# EAGLE board DashDial (EAGLE 9.6.2)
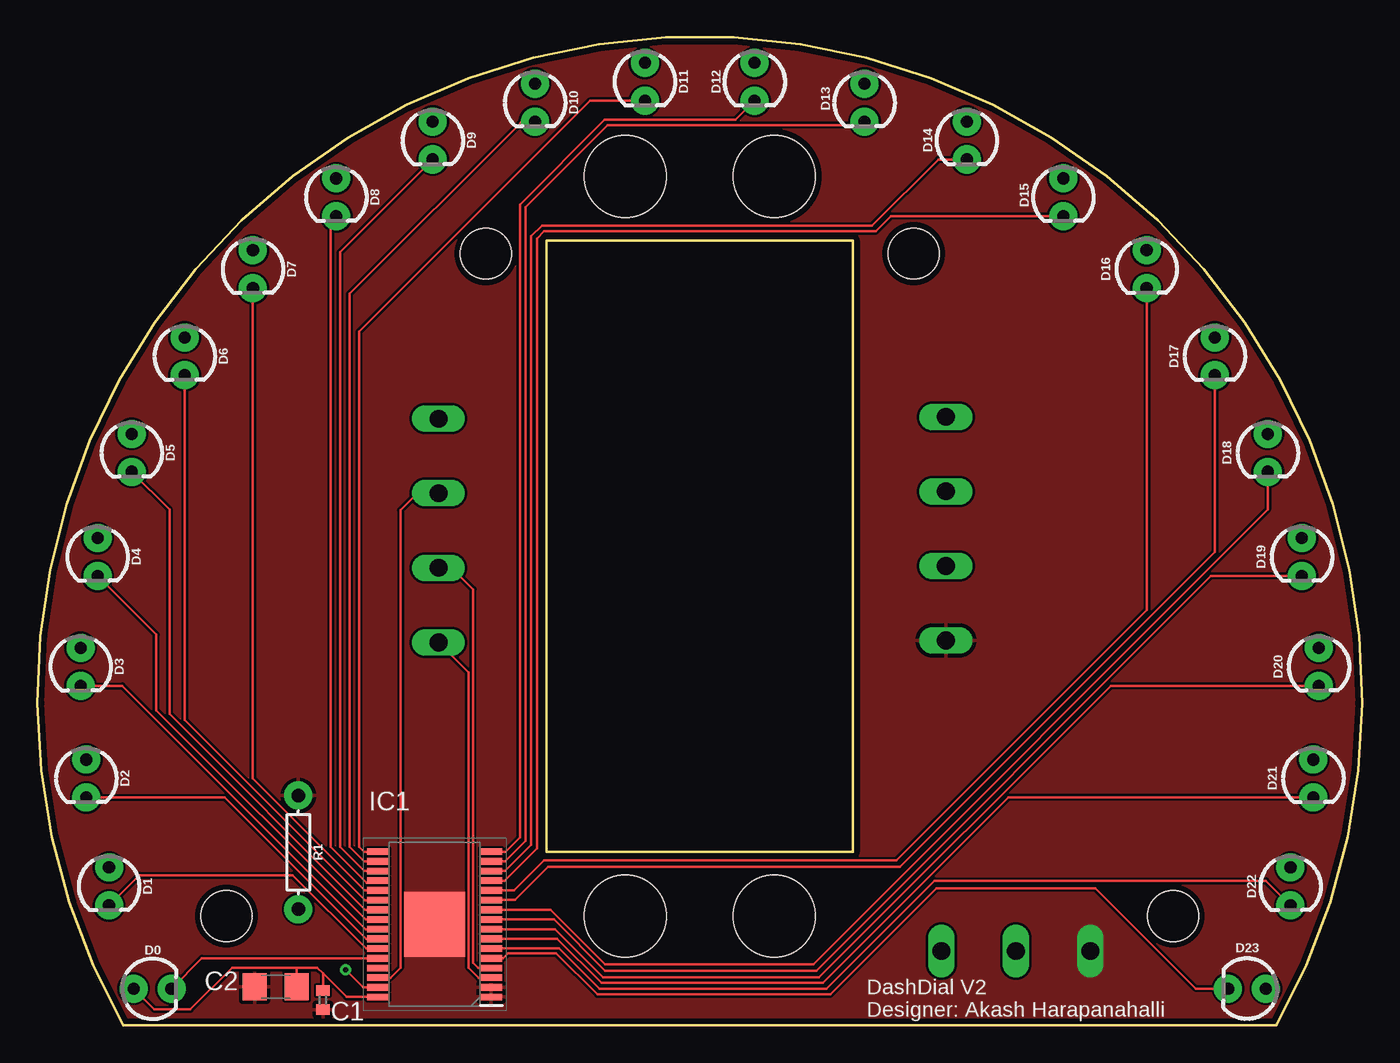
[diagram p0: board, top side]
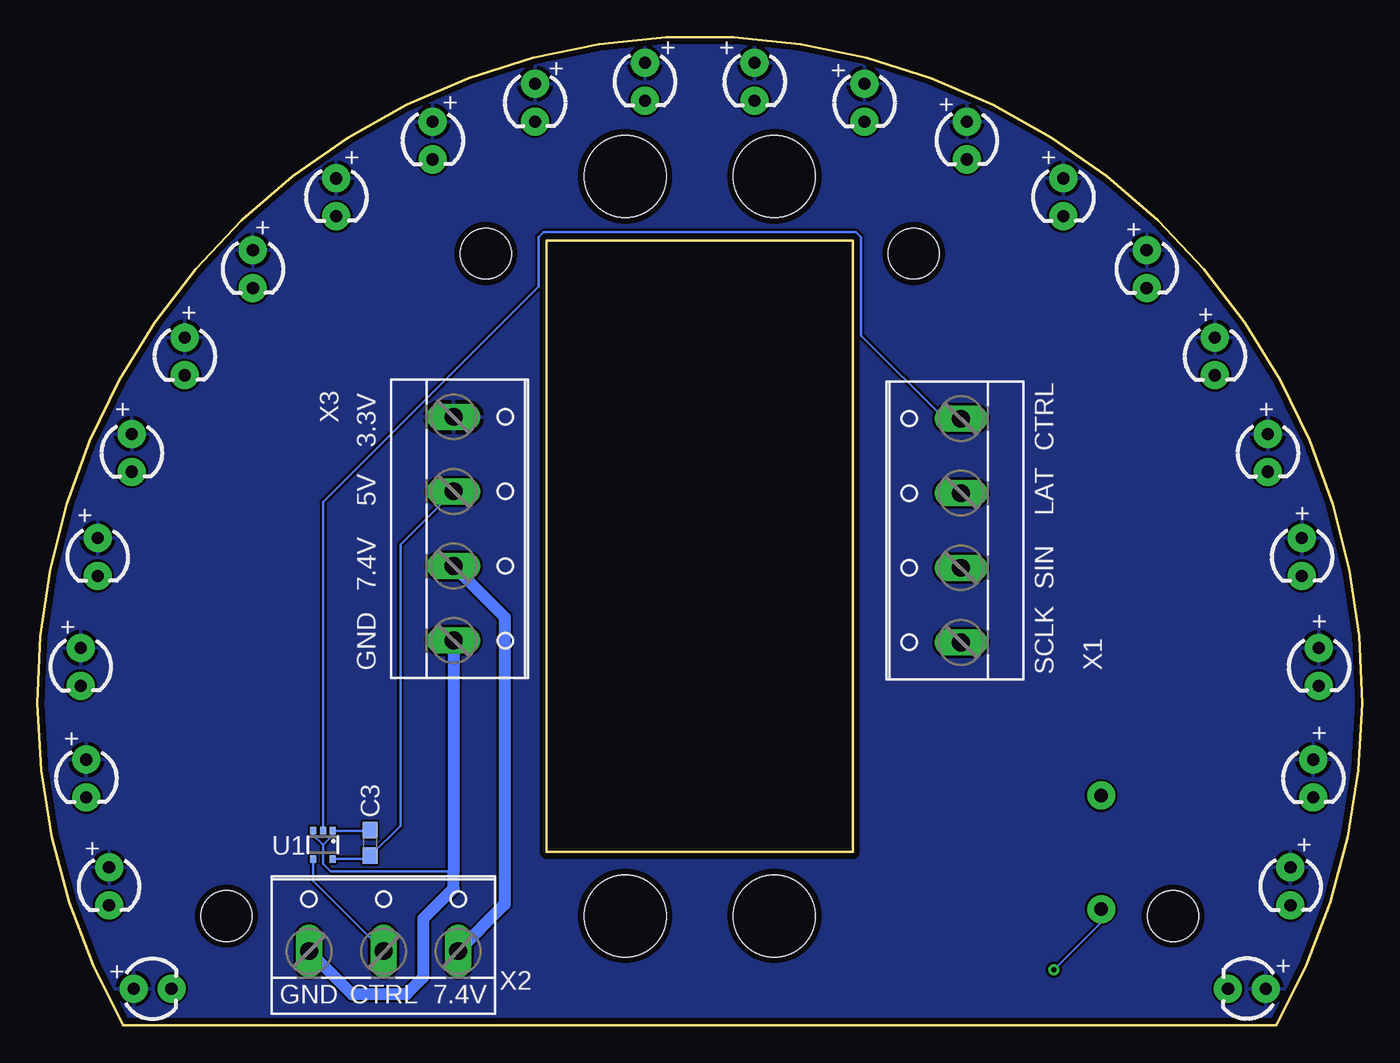
[diagram p1: board, bottom side, seen from below]

Size 88.87 x 66.28 mm. Coordinates in mm from the lower left corner, seen from the top.
Outline: 5.77,0 arc-239 83.09,0 5.77,0
Outline: 34.17,11.63 34.17,52.65 54.7,52.65 54.7,11.63 34.17,11.63
Copper layers (1*16): Top 0.035mm / dielectric 1.5mm / Bottom 0.035mm
Design rules "default *": minimum track width 6mil, minimum drill 0.35mm, track to track 6mil, track to pad 6mil, pad to pad 6mil, via to via 6mil, smd to smd 6mil, copper to edge 0.4mm, drill to drill 6mil, minimum pad ring 10mil, minimum via ring 8mil, stop-mask expansion 4mil, vias tented up to drill 0mil, thermal gap 10mil
Holes 5.51 mm at 39.43,56.95 49.44,56.95 39.43,7.34 49.44,7.34
Holes 3.4 mm at 12.68,7.34 30.08,51.77 58.78,51.77 76.18,7.34

## Footprints (pad centres in the part's own frame; a part is rotated, then mirrored left to right if it is on the bottom)
C0402 = smd 0.7 x 0.9: 1 -0.65,0; 2 0.65,0
C1206 = smd 1.6 x 1.8: 1 -1.4,0; 2 1.4,0
0603 = smd 1.1 x 1: 1 -0.85,0; 2 0.85,0
LED_3MM = drill 0.813 pad 1.88: A -1.27,0; K 1.27,0
SOP65P810X120-33N = smd 1.475 x 0.45: 1 -3.788,4.875; 2 -3.788,4.225; 3 -3.788,3.575; 4 -3.788,2.925; 5 -3.788,2.275; 6 -3.788,1.625; 7 -3.788,0.975; 8 -3.788,0.325; 9 -3.788,-0.325; 10 -3.788,-0.975; 11 -3.788,-1.625; 12 -3.788,-2.275; 13 -3.788,-2.925; 14 -3.788,-3.575; 15 -3.788,-4.225; 16 -3.788,-4.875; 17 3.788,-4.875; 18 3.788,-4.225; 19 3.788,-3.575; 20 3.788,-2.925; 21 3.788,-2.275; 22 3.788,-1.625; 23 3.788,-0.975; 24 3.788,-0.325; 25 3.788,0.325; 26 3.788,0.975; 27 3.788,1.625; 28 3.788,2.275; 29 3.788,2.925; 30 3.788,3.575; 31 3.788,4.225; 32 3.788,4.875 | smd 4.11 x 4.36: 33 0,0
AXIAL-0.3 = drill 0.9 pad 1.88: P$1 -3.81,0; P$2 3.81,0
SOT353 = smd 0.4 x 0.5: 1 -0.65,-0.95; 2 0,-0.95; 3 0.65,-0.95; 4 0.65,0.95; 5 -0.65,0.95
W237-4 = drill 1.194 long: 1 -7.5,-1.27; 2 -2.5,-1.27; 3 2.5,-1.27; 4 7.5,-1.27
W237-103 = drill 1.194 long: 1 -5,-1.29; 2 0,-1.29; 3 5,-1.29

## Placement (x,y rotation side)
C1  0.1uF  [C0402]  19.16,1.7 90 top
C2  100uF  [C1206]  15.99,2.59 0 top
C3  0.1uF  [0603]  66.53,12.24 90 bottom
D0  [LED_3MM]  7.73,2.46 0 top
D1  [LED_3MM]  4.81,9.32 270 top
D2  [LED_3MM]  3.29,16.56 270 top
D3  [LED_3MM]  2.9,24.05 270 top
D4  [LED_3MM]  4.05,31.42 270 top
D5  [LED_3MM]  6.33,38.4 270 top
D6  [LED_3MM]  9.89,44.88 270 top
D7  [LED_3MM]  14.46,50.72 270 top
D8  [LED_3MM]  20.05,55.55 270 top
D9  [LED_3MM]  26.53,59.36 270 top
D10  [LED_3MM]  33.38,61.9 270 top
D11  [LED_3MM]  40.75,63.3 270 top
D12  [LED_3MM]  48.12,63.3 270 top
D13  [LED_3MM]  55.48,61.9 270 top
D14  [LED_3MM]  62.34,59.36 270 top
D15  [LED_3MM]  68.82,55.55 270 top
D16  [LED_3MM]  74.41,50.72 270 top
D17  [LED_3MM]  78.98,44.88 270 top
D18  [LED_3MM]  82.53,38.4 270 top
D19  [LED_3MM]  84.82,31.42 270 top
D20  [LED_3MM]  85.96,24.05 270 top
D21  [LED_3MM]  85.58,16.56 270 top
D22  [LED_3MM]  84.06,9.32 270 top
D23  [LED_3MM]  81.14,2.46 180 top
IC1  TLC5947DAPR  [SOP65P810X120-33N]  26.65,6.78 180 top
R1  3k  [AXIAL-0.3]  17.51,11.61 270 top
U1  LOGIC SHIFTER  [SOT353]  69.71,12.12 180 bottom
X1  LOGIC  [W237-4]  28.18,33.2 90 bottom
X2  SERVO  [W237-103]  65.64,6.27 0 bottom
X3  POWER  [W237-4]  59.67,33.32 270 bottom

## Library data of the parts
C1 C2 = rcl; SPICEPREFIX: C
C3 = SparkFun-Capacitors; PROD_ID: CAP-00810
D0 D1-D23 = SparkFun-LED; PROD_ID: DIO-08794
IC1 = TLC5947DAPR; ARROW_PART_NUMBER: TLC5947DAPR; ARROW_PRICE-STOCK: https://www.arrow.com/en/products/tlc5947dapr/texas-instruments; DESCRIPTION: 24-Channel, 12-Bit PWM LED Driver with Internal Oscillator; HEIGHT: 1.2mm; MANUFACTURER_NAME: Texas Instruments; MANUFACTURER_PART_NUMBER: TLC5947DAPR; MOUSER_PART_NUMBER: 595-TLC5947DAPR; MOUSER_PRICE-STOCK: https://www.mouser.co.uk/ProductDetail/Texas-Instruments/TLC5947DAPR?qs=Vj8prLbzEFAFq%2FnrzWbKjQ%3D%3D
R1 = SparkFun-Resistors
U1 = MC74VHC1GT125; AVAILABILITY: Unavailable; DESCRIPTION: Buffer, Non-Inverting 1 Element 1 Bit per Element 3-State Output SC-88A (SC-70-5/SOT-353); MF: ON Semiconductor; MP: MC74VHC1GT125; PACKAGE: SOT-353 ON Semiconductor; PRICE: None
X1 X3 = con-wago-500; OC_FARNELL: unknown; OC_NEWARK: unknown
X2 = con-wago-500; MPN: 237-103; OC_FARNELL: unknown; OC_NEWARK: 18M7116

## Nets
3.3V: C1.2 C2.2 D0.A D1.A D2.A D3.A D4.A D5.A D6.A D7.A D8.A D9.A D10.A D11.A D12.A D13.A D14.A D15.A D16.A D17.A D18.A D19.A D20.A D21.A D22.A D23.A IC1.32 X3.1
5V: C3.1 U1.5 X3.2
7.4V: X2.3 X3.3
GND: C1.1 C2.1 C3.2 IC1.1 IC1.2 IC1.33 R1.P$1 U1.1 U1.3 X2.1 X3.4
LAT: IC1.30 X1.3
N$1: U1.4 X2.2
N$32: IC1.31 R1.P$2
OUT0: D23.K IC1.5
OUT1: D22.K IC1.6
OUT2: D21.K IC1.7
OUT3: D20.K IC1.8
OUT4: D19.K IC1.9
OUT5: D18.K IC1.10
OUT6: D17.K IC1.11
OUT7: D16.K IC1.12
OUT8: D15.K IC1.13
OUT9: D14.K IC1.14
OUT10: D13.K IC1.15
OUT11: D12.K IC1.16
OUT12: D11.K IC1.17
OUT13: D10.K IC1.18
OUT14: D9.K IC1.19
OUT15: D8.K IC1.20
OUT16: D7.K IC1.21
OUT17: D6.K IC1.22
OUT18: D5.K IC1.23
OUT19: D4.K IC1.24
OUT20: D3.K IC1.25
OUT21: D2.K IC1.26
OUT22: D1.K IC1.27
OUT23: D0.K IC1.28
SCLK: IC1.3 X1.1
SERVO_CTRL: U1.2 X1.4
SIN: IC1.4 X1.2

## Tracks (layer width: path | path; a pad name or v marks a point on that pad's centre or on a via)
3.3V
  Top 0.152: D0.A 7.86,1.07 10.27,1.07 13.06,3.86 17.38,3.86 | 17.38,3.86 18.78,3.86 19.16,3.48 | 19.16,3.48 C1.2 | 19.16,3.48 20.73,1.91 IC1.32 | C2.2 17.39,3.86 17.38,3.86
  pour Bottom: -10.05,68.63 -10.05,9.45 4.17,-4.78 86.98,-4.78 89.9,-1.85 101.84,10.08 101.84,69.27 101.2,68.63
5V
  Bottom 0.152: U1.5 66.76,11.17 C3.1 66.49,11.39 64.5,13.39 64.5,32.27 X3.2
7.4V
  Bottom 0.813: X2.3 57.51,8.11 57.51,27.4 X3.3
GND
  Bottom 0.152: C3.2 66.56,13.07 U1.1 69.06,12.77 69.71,12.12 | 69.71,12.12 70.36,12.77 U1.3 | 69.71,12.12 69.71,10.85 69.2,10.34 60.94,10.34
  Bottom 0.813: X2.1 67.74,2.08 64.12,2.08 62.98,3.23 62.98,7.16 60.94,9.19 60.94,10.34 X3.4
  pour Top (rank 2): -13.86,71.3 -13.86,8.94 4.56,-9.47 87.36,-9.47 105.52,8.69 105.52,71.04 105.52,71.81 105.01,71.3
  pour Top (no thermals): 24.37,10.08 28.94,10.08 28.94,3.99 24.37,3.99
  pour Top (no thermals): 69.58,7.29 72.12,7.29 72.12,2.59 69.33,2.59 69.33,7.29
LAT
  Top 0.152: IC1.30 23.71,3.21 24.37,3.86 24.37,34.56 25.5,35.7 X1.3
N$1
  Bottom 0.152: U1.4 70.36,9.7 X2.2
N$32  (via drill 0.35)
  Top 0.152: IC1.31 21.86,2.56 v20.68,3.73
  Bottom 0.152: v20.68,3.73 17.51,6.91 R1.P$2
OUT0
  Top 0.152: IC1.5 31.24,4.51 31.58,4.85 34.81,4.85 37.58,2.08 53.2,2.08 60.31,9.19 70.98,9.19 77.71,2.46 D23.K
OUT1
  Top 0.152: IC1.6 35.01,5.16 37.7,2.46 52.94,2.46 60.18,9.7 82.41,9.7 D22.K
OUT2
  Top 0.152: IC1.7 34.87,5.81 37.83,2.84 52.69,2.84 65.13,15.29 D21.K
OUT3
  Top 0.152: IC1.8 34.73,6.46 37.96,3.23 52.43,3.23 71.99,22.78 D20.K
OUT4
  Top 0.152: IC1.9 34.66,7.11 38.09,3.68 52.25,3.68 78.72,30.15 D19.K
OUT5
  Top 0.152: IC1.10 34.44,7.76 38.09,4.11 52.05,4.11 82.53,34.59 D18.K
OUT6
  Top 0.152: IC1.11 30.47,8.43 32.04,8.43 34.25,10.65 57.88,10.65 78.98,31.75 D17.K
OUT7
  Top 0.152: IC1.12 30.45,9.07 31.99,9.07 34,11.08 57.62,11.08 74.41,27.86 D16.K
OUT8
  Top 0.152: IC1.13 31.36,9.71 33.51,11.86 33.51,52.77 34,53.26 56.24,53.26 57.26,54.28 D15.K
OUT9
  Top 0.152: IC1.14 31.37,10.36 33.13,12.12 33.13,52.93 33.84,53.64 55.99,53.64 60.44,58.09 D14.K
OUT10
  Top 0.152: IC1.15 31.39,11.01 32.75,12.37 32.75,54.89 38.24,60.38 55.23,60.38 D13.K
OUT11
  Top 0.152: IC1.16 31.4,11.66 32.37,12.62 32.37,55.06 38.06,60.76 46.85,60.76 D12.K
OUT12
  Top 0.152: IC1.17 21.91,11.66 21.57,11.99 21.57,46.53 37.07,62.03 D11.K
OUT13
  Top 0.152: IC1.18 21.92,11.01 20.94,11.99 20.94,49.07 32.37,60.5 32.5,60.63 D10.K
OUT14
  Top 0.152: IC1.19 21.94,10.36 20.3,11.99 20.3,51.87 D9.K
OUT15
  Top 0.152: IC1.20 22.74,9.58 22.08,9.58 19.67,11.99 19.67,53.9 D8.K
OUT16
  Top 0.152: IC1.21 21.97,9.06 14.46,16.56 D7.K
OUT17
  Top 0.152: IC1.22 21.98,8.41 9.89,20.5 D6.K
OUT18
  Top 0.152: IC1.23 22,7.76 8.87,20.88 8.87,34.59 D5.K
OUT19
  Top 0.152: IC1.24 22.01,7.11 7.98,21.13 7.98,26.21 D4.K
OUT20
  Top 0.152: IC1.25 22.03,6.46 5.7,22.78 D3.K
OUT21
  Top 0.152: IC1.26 22.04,5.81 12.56,15.29 D2.K
OUT22
  Top 0.152: IC1.27 22.06,5.16 17.13,10.08 6.84,10.08 D1.K
OUT23
  Top 0.152: IC1.28 11.04,4.51 D0.K
SCLK
  Top 0.152: IC1.3 29.59,3.21 28.94,3.86 28.94,23.67 X1.1
SERVO_CTRL
  Bottom 0.152: U1.2 69.71,35.1 55.25,49.56 55.25,52.88 54.92,53.21 33.94,53.21 33.62,52.88 33.62,46.28 28.04,40.7 X1.4
SIN
  Top 0.152: IC1.4 29.58,3.86 29.24,4.19 29.24,29.26 27.8,30.7 X1.2

## Text on the board
tPlace: DashDial V2 / Designer: Akash Harapanahalli
bNames: + | + | + | + | + | + | + | + | + | + | + | + | + | + | CTRL | 3.3V | 5V | + | LAT | + | SIN | 7.4V | + | + | SCLK | GND | + | + | + | + | + | + | 7.4V | CTRL | GND